# EAGLE board CT_schematic (EAGLE 7.6.0)

Size 100 x 80 mm. Coordinates in mm from the lower left corner, seen from the top.
Outline: 0,0 100,0 100,80 0,80 0,0
Copper layers (1*16): Top 0.035mm / dielectric 1.5mm / Bottom 0.035mm
Design rules "default": minimum track width 10mil, minimum drill 24mil, track to track 8mil, track to pad 8mil, pad to pad 8mil, via to via 8mil, smd to smd 8mil, copper to edge 40mil, drill to drill 8mil, minimum pad ring 10mil, minimum via ring 8mil, stop-mask expansion 4mil, vias tented up to drill 0mil, thermal gap 10mil

## Footprints (pad centres in the part's own frame; a part is rotated, then mirrored left to right if it is on the bottom)
C0603 = smd 0.8 x 0.8: 1 -0.762,0; 2 0.762,0
C0402 = smd 0.5 x 0.5: 1 -0.508,0; 2 0.508,0
C0805 = smd 1.2 x 1.3: 1 -1.016,0; 2 1.016,0
C1206 = smd 1.3 x 1.6: 1 -1.524,0; 2 1.524,0
L0603 = smd 0.8 x 0.8: 1 -0.762,0; 2 0.762,0
L1210 = smd 1.2 x 2.5: 1 -1.524,0; 2 1.524,0
DR1040 = smd 1.6 x 3.2: 1 -4.458,0; 2 4.458,0
R0603 = smd 0.8 x 0.8: 1 -0.762,0; 2 0.762,0
TFBGA64 = smd 0.35 x 0.35: A1 -1.75,1.75; A2 -1.25,1.75; A3 -0.75,1.75; A4 -0.25,1.75; A5 0.25,1.75; A6 0.75,1.75; A7 1.25,1.75; A8 1.75,1.75; B1 -1.75,1.25; B2 -1.25,1.25; B3 -0.75,1.25; B4 -0.25,1.25; B5 0.25,1.25; B6 0.75,1.25; B7 1.25,1.25; B8 1.75,1.25; C1 -1.75,0.75; C2 -1.25,0.75; C3 -0.75,0.75; C4 -0.25,0.75; C5 0.25,0.75; C6 0.75,0.75; C7 1.25,0.75; C8 1.75,0.75; D1 -1.75,0.25; D2 -1.25,0.25; D3 -0.75,0.25; D4 -0.25,0.25; D5 0.25,0.25; D6 0.75,0.25; D7 1.25,0.25; D8 1.75,0.25; E1 -1.75,-0.25; E2 -1.25,-0.25; E3 -0.75,-0.25; E4 -0.25,-0.25; E5 0.25,-0.25; E6 0.75,-0.25; E7 1.25,-0.25; E8 1.75,-0.25; F1 -1.75,-0.75; F2 -1.25,-0.75; F3 -0.75,-0.75; F4 -0.25,-0.75; F5 0.25,-0.75; F6 0.75,-0.75; F7 1.25,-0.75; F8 1.75,-0.75; G1 -1.75,-1.25; G2 -1.25,-1.25; G3 -0.75,-1.25; G4 -0.25,-1.25; G5 0.25,-1.25; G6 0.75,-1.25; G7 1.25,-1.25; G8 1.75,-1.25; H1 -1.75,-1.75; H2 -1.25,-1.75; H3 -0.75,-1.75; H4 -0.25,-1.75; H5 0.25,-1.75; H6 0.75,-1.75; H7 1.25,-1.75; H8 1.75,-1.75
SOIC-8 = smd 1.6 x 0.6: 1 -2.7,1.905 | smd 1.55 x 0.6: 2 -2.7,0.635; 3 -2.7,-0.635; 4 -2.7,-1.905; 5 2.7,-1.905; 6 2.7,-0.635; 7 2.7,0.635; 8 2.7,1.905
SSOP-16 = smd 1.981 x 0.356: 1 -2.464,2.223; 2 -2.464,1.587; 3 -2.464,0.953; 4 -2.464,0.318; 5 -2.464,-0.318; 6 -2.464,-0.953; 7 -2.464,-1.587; 8 -2.464,-2.223; 9 2.464,-2.223; 10 2.464,-1.587; 11 2.464,-0.953; 12 2.464,-0.318; 13 2.464,0.318; 14 2.464,0.953; 15 2.464,1.587; 16 2.464,2.223
HTSS-105-01-G-D = drill 1 pad 1.8 square: 1 0,0 | drill 1 pad 1.8: 2 0,2.54; 3 2.54,0; 4 2.54,2.54; 5 5.08,0; 6 5.08,2.54; 7 7.62,0; 8 7.62,2.54; 9 10.16,0; 10 10.16,2.54
RFM75-S = smd 0.85 x 1.6: 1 1.7,0.8; 2 2.97,0.8; 3 4.24,0.8; 4 5.51,0.8; 5 6.78,0.8; 6 8.05,0.8; 7 9.32,0.8; 8 10.59,0.8
FCI_10118193-0001LF = smd 0.4 x 1.35: 1 -1.3,2.675; 2 -0.65,2.675; 3 0,2.675; 4 0.65,2.675; 5 1.3,2.675 | smd 1.6 x 1.4: 6 -3.2,2.45; 7 3.2,2.45 | smd 1.9 x 1.9: 8 -1.2,0; 9 1.2,0 | hole 0.5: -3.3,0; 3.3,0
SOT143B = smd 1 x 0.7: 1 -0.75,-1 | smd 0.6 x 0.7: 2 0.95,-1; 3 0.95,1; 4 -0.95,1
ABLS-25.000MHZ-B2F-T = smd 5.6 x 2.8: 1 -3.81,0; 2 5.69,0
ASEK = smd 1.4 x 1: 1 -1.1,-0.8; 2 1.1,-0.8; 3 1.1,0.8; 4 -1.1,0.8
TSOT-23-5 = smd 1.3 x 0.62: 1 -1.31,0.95; 2 -1.31,0; 3 -1.31,-0.95; 4 1.31,-0.95; 5 1.31,0.95
DFN8_2X3MC = smd 0.813 x 0.305: 1 -1.398,0.75; 2 -1.398,0.25; 3 -1.398,-0.25; 4 -1.398,-0.75; 5 1.398,-0.75; 6 1.398,-0.25; 7 1.398,0.25; 8 1.398,0.75 | smd 1.753 x 1.549: 9 0,0
JST-2-SMD = smd 1 x 4.6: 1 -1,-3.7; 2 1,-3.7 | smd 1.6 x 3.4: NC1 -3.4,1.5; NC2 3.4,1.5
SON-6 = smd 0.55 x 0.3: 1 -0.355,0.5 | smd 0.52 x 0.3: 2 -0.37,0; 3 -0.37,-0.5; 4 0.37,-0.5; 5 0.37,0; 6 0.37,0.5
SW_4-1437565-2 = smd 1.4 x 2.1: 1 -2.23,4.55; 2 -2.23,-4.55; 3 2.23,4.55; 4 2.23,-4.55
LGM67K-G1J2-24-Z = smd 0.8 x 1.4: A -2,0; C 0,0
NC7SZ125M5X = smd 1.3 x 0.7: 1 -1.3,0.95; 2 -1.3,0; 3 -1.3,-0.95; 4 1.3,-0.95; 5 1.3,0.95

## Placement (x,y rotation side)
C1  1e-07  [C0603]  -26.67,66.04 0 top  (outside the outline)
C2  1e-07  [C0603]  -30.48,66.04 0 top  (outside the outline)
C3  1e-07  [C0603]  -34.29,66.04 0 top  (outside the outline)
C4  1e-07  [C0603]  -38.1,66.04 0 top  (outside the outline)
C5  4.7e-06  [C0603]  -19.05,66.04 0 top  (outside the outline)
C6  1e-07  [C0603]  -41.91,66.04 0 top  (outside the outline)
C7  1e-08  [C0603]  -45.72,66.04 0 top  (outside the outline)
C8  1e-06  [C0603]  -49.53,66.04 0 top  (outside the outline)
C9  1e-07  [C0603]  -53.34,66.04 0 top  (outside the outline)
C10  1e-11  [C0402]  -41.91,71.12 0 top  (outside the outline)
C11  1e-11  [C0402]  -45.72,71.12 0 top  (outside the outline)
C12  1e-08  [C0402]  -49.53,71.12 0 top  (outside the outline)
C13  1e-06  [C0603]  -57.15,66.04 0 top  (outside the outline)
C14  1e-06  [C0603]  -60.96,66.04 0 top  (outside the outline)
C15  2.2e-07  [C0603]  -22.86,66.04 0 top  (outside the outline)
C16  1e-06  [C0603]  -64.77,66.04 0 top  (outside the outline)
C17  1e-06  [C0603]  -15.24,71.12 0 top  (outside the outline)
C18  1e-07  [C0402]  -53.34,71.12 0 top  (outside the outline)
C19  1e-06  [C0603]  -19.05,71.12 0 top  (outside the outline)
C20  1e-08  [C0402]  -57.15,71.12 0 top  (outside the outline)
C21  1e-05  [C0805]  -40.64,54.61 0 top  (outside the outline)
C22  1e-05  [C0805]  -45.72,54.61 0 top  (outside the outline)
C23  1e-07  [C0402]  -60.96,71.12 0 top  (outside the outline)
C24  1e-05  [C1206]  -22.86,54.61 0 top  (outside the outline)
C25  1e-05  [C1206]  -29.21,54.61 0 top  (outside the outline)
C26  1e-08  [C0402]  -64.77,71.12 0 top  (outside the outline)
F1  240.0  [L0603]  -22.86,71.12 0 top  (outside the outline)
I1  1e-05  [L1210]  -16.51,55.88 0 top  (outside the outline)
I2  5.2e-06  [DR1040]  -53.34,6.35 0 top  (outside the outline)
R2  1000.0  [R0603]  -26.67,71.12 0 top  (outside the outline)
R4  4700.0  [R0603]  -30.48,71.12 0 top  (outside the outline)
R5  10000.0  [R0603]  -30.48,60.96 0 top  (outside the outline)
R6  10000.0  [R0603]  -35.56,60.96 0 top  (outside the outline)
R7  10000.0  [R0603]  -40.64,60.96 0 top  (outside the outline)
R8  10000.0  [R0603]  -45.72,60.96 0 top  (outside the outline)
R9  100000.0  [R0603]  -63.5,54.61 0 top  (outside the outline)
R10  10000.0  [R0603]  -50.8,60.96 0 top  (outside the outline)
R11  10000.0  [R0603]  -55.88,60.96 0 top  (outside the outline)
R12  220000.0  [R0603]  -15.24,60.96 0 top  (outside the outline)
R13  1000000.0  [R0603]  -58.42,54.61 0 top  (outside the outline)
R14  10000.0  [R0603]  -60.96,60.96 0 top  (outside the outline)
R15  10000.0  [R0603]  -66.04,60.96 0 top  (outside the outline)
R16  9100.0  [R0603]  -34.29,71.12 0 top  (outside the outline)
R17  680000.0  [R0603]  -20.32,60.96 0 top  (outside the outline)
R18  120000.0  [R0603]  -25.4,60.96 0 top  (outside the outline)
R19  2000.0  [R0603]  -38.1,71.12 0 top  (outside the outline)
R20  10000.0  [R0603]  -15.24,66.04 0 top  (outside the outline)
U1  STM32L053R8H6  [TFBGA64]  -24.13,39.37 0 top  (outside the outline)
U2  AT25080B-SSHL-T  [SOIC-8]  -39.37,39.37 0 top  (outside the outline)
U3  LTC2804CGN-1#PBF  [SSOP-16]  -44.45,29.21 0 top  (outside the outline)
U4  HTSS-105-01-G-D  [HTSS-105-01-G-D]  -63.5,27.94 0 top  (outside the outline)
U5  RFM75-S  [RFM75-S]  -26.67,3.81 0 top  (outside the outline)
U6  10118193-0001LF  [FCI_10118193-0001LF]  -49.53,38.1 0 top  (outside the outline)
U7  prtr5v0u2ax  [SOT143B]  -24.13,76.2 0 top  (outside the outline)
U8  ABLS-25.000MHZ-B2F-T  [ABLS-25.000MHZ-B2F-T]  -45.72,48.26 0 top  (outside the outline)
U9  ASEK-32.768KHz-ECST  [ASEK]  -29.21,48.26 0 top  (outside the outline)
U10  ltc3406es5  [TSOT-23-5]  -50.8,54.61 0 top  (outside the outline)
U11  MCP73831T-2ACI/MC  [DFN8_2X3MC]  -34.29,74.93 0 top  (outside the outline)
U12  S2B-PH-SM4-TB(LF)(SN)  [JST-2-SMD]  -22.86,30.48 0 top  (outside the outline)
U13  TPS3895ADRYR  [SON-6]  -27.94,74.93 0 top  (outside the outline)
U14  4-1437565-2  [SW_4-1437565-2]  -43.18,6.35 0 top  (outside the outline)
U15  Q65110A2395  [LGM67K-G1J2-24-Z]  -57.15,48.26 0 top  (outside the outline)
U16  nc7sz125m5x  [NC7SZ125M5X]  -34.29,54.61 0 top  (outside the outline)

## Library data of the parts
C1-C26 F1 I1 I2 R2 R4-R20 U1-U16 = circuit_tree

## Nets
CLK_CRYSTAL_U1_C1: C10.1 U1.C1 U8.1
CLK_CRYSTAL_U1_D1: C11.1 U1.D1 U8.2
CLK_U1_A1: U1.A1 U9.3
GND: C1.2 C2.2 C3.2 C4.2 C5.2 C6.2 C7.2 C8.2 C9.2 C10.2 C11.2 C12.2 C13.2 C14.2 C16.2 C17.2 C18.2 C19.2 C20.2 C21.2 C22.1 C22.2 C23.2 C24.2 C25.2 C26.2 R2.2 R5.2 R12.2 R16.2 R18.2 R19.2 U1.C2 U1.D4 U1.D5 U1.D6 U1.F1 U2.4 U3.8 U4.9 U5.1 U6.5 U6.6 U6.7 U6.8 U6.9 U7.1 U9.2 U10.2 U11.6 U11.9 U12.2 U13.2 U15.C U16.1 U16.3
INPUT_USBPOWER_5V: C24.1 R20.2 U6.1 U7.4 U11.1 U11.2
NET_U1_B2: C6.1 U1.B2
NET_U1_B4: R5.1 U1.B4
NET_U1_E1: R4.1 U1.E1 U16.4
NET_U1_H1: C7.1 C8.1 F1.1 U1.G1 U1.H1
NET_U1_H7: U15.A
NET_U1_H8: U14.3 U14.4
NET_U2_3: R6.1 U2.3
NET_U2_7: R8.1 U2.7
NET_U3_6: C13.1 U3.6
NET_U3_7: C15.1 I1.2 U3.7
NET_U3_9: C14.1 U3.9
NET_U3_10: C15.2 U3.10
NET_U3_11: R9.1 U3.11
NET_U4_3: U3.1 U4.3
NET_U4_4: U3.2 U4.4
NET_U4_5: U3.3 U4.5
NET_U4_6: U3.4 U4.6
NET_U5_3: R10.1 U5.3
NET_U10_1: U10.1
NET_U10_3: I2.1 U10.3
NET_U10_5: R12.1 R13.1 U10.5
NET_U10_ATNET_3: I2.2 R13.2
NET_U11_5: R20.1 U11.5
NET_U11_8: R19.1 U11.8
NET_U13_1: R15.1 R16.1 U13.1
NET_U13_3: R17.2 R18.1 U13.3
NET_U13_4: R14.1 U13.4 U16.2
NET_U14_1: R2.1 U14.1 U14.2
PROC_LPUART1_CTS: U1.G4 U3.13
PROC_LPUART1_RTS: U1.B5 U3.15
PROC_LPUART1_RX: U1.B6 U3.16
PROC_LPUART1_TX: U1.B7 U3.14
PROC_SPI1_MISO: U1.A4 U5.7
PROC_SPI1_MOSI: U1.C4 U5.6
PROC_SPI1_NSS: R11.1 U1.A6 U5.4
PROC_SPI1_SCK: U1.A5 U5.5
PROC_SPI2_MISO: U1.F2 U2.2
PROC_SPI2_MOSI: U1.F7 U2.5
PROC_SPI2_NSS: R7.1 U1.A3 U2.1
PROC_SPI2_SCK: U1.G7 U2.6
PROC_USB_DM: U1.C8 U6.2 U7.3
PROC_USB_DP: U1.B8 U6.3 U7.2
VCC_S1_3V7: C21.1 C25.1 U10.4 U11.3 U11.4 U12.1
VCC_TIER1_3V3: C1.1 C2.1 C3.1 C4.1 C5.1 C9.1 C12.1 C16.1 C17.1 C18.1 C19.1 C20.1 C22.2 C23.1 C26.1 F1.2 I1.1 I2.2 R4.2 R6.2 R7.2 R8.2 R9.2 R10.2 R11.2 R13.2 R14.2 R15.2 R17.1 U1.D2 U1.E4 U1.E5 U1.E6 U2.8 U3.5 U3.12 U5.2 U9.4 U13.6 U16.5

## Tracks (layer width: path | path; a pad name or v marks a point on that pad's centre or on a via)
CLK_CRYSTAL_U1_C1  (2 unrouted)
CLK_CRYSTAL_U1_D1  (2 unrouted)
CLK_U1_A1  (1 unrouted)
GND  (55 unrouted)
INPUT_USBPOWER_5V  (5 unrouted)
NET_U1_B2  (1 unrouted)
NET_U1_B4  (1 unrouted)
NET_U1_E1  (2 unrouted)
NET_U1_H1  (4 unrouted)
NET_U1_H8  (1 unrouted)
NET_U2_3  (1 unrouted)
NET_U2_7  (1 unrouted)
NET_U3_6  (1 unrouted)
NET_U3_7  (2 unrouted)
NET_U3_9  (1 unrouted)
NET_U3_10  (1 unrouted)
NET_U3_11  (1 unrouted)
NET_U4_3  (1 unrouted)
NET_U4_4  (1 unrouted)
NET_U4_5  (1 unrouted)
NET_U4_6  (1 unrouted)
NET_U5_3  (1 unrouted)
NET_U10_3  (1 unrouted)
NET_U10_5  (2 unrouted)
NET_U10_ATNET_3  (1 unrouted)
NET_U11_5  (1 unrouted)
NET_U11_8  (1 unrouted)
NET_U13_1  (2 unrouted)
NET_U13_3  (2 unrouted)
NET_U13_4  (2 unrouted)
NET_U14_1  (2 unrouted)
PROC_LPUART1_CTS  (1 unrouted)
PROC_LPUART1_RTS  (1 unrouted)
PROC_LPUART1_RX  (1 unrouted)
PROC_LPUART1_TX  (1 unrouted)
PROC_SPI1_MISO  (1 unrouted)
PROC_SPI1_MOSI  (1 unrouted)
PROC_SPI1_NSS  (2 unrouted)
PROC_SPI1_SCK  (1 unrouted)
PROC_SPI2_MISO  (1 unrouted)
PROC_SPI2_MOSI  (1 unrouted)
PROC_SPI2_NSS  (2 unrouted)
PROC_SPI2_SCK  (1 unrouted)
PROC_USB_DM  (2 unrouted)
PROC_USB_DP  (2 unrouted)
VCC_S1_3V7  (5 unrouted)
VCC_TIER1_3V3  (39 unrouted)